# EAGLE board Board_Kelompok12 (EAGLE 7.2.0)
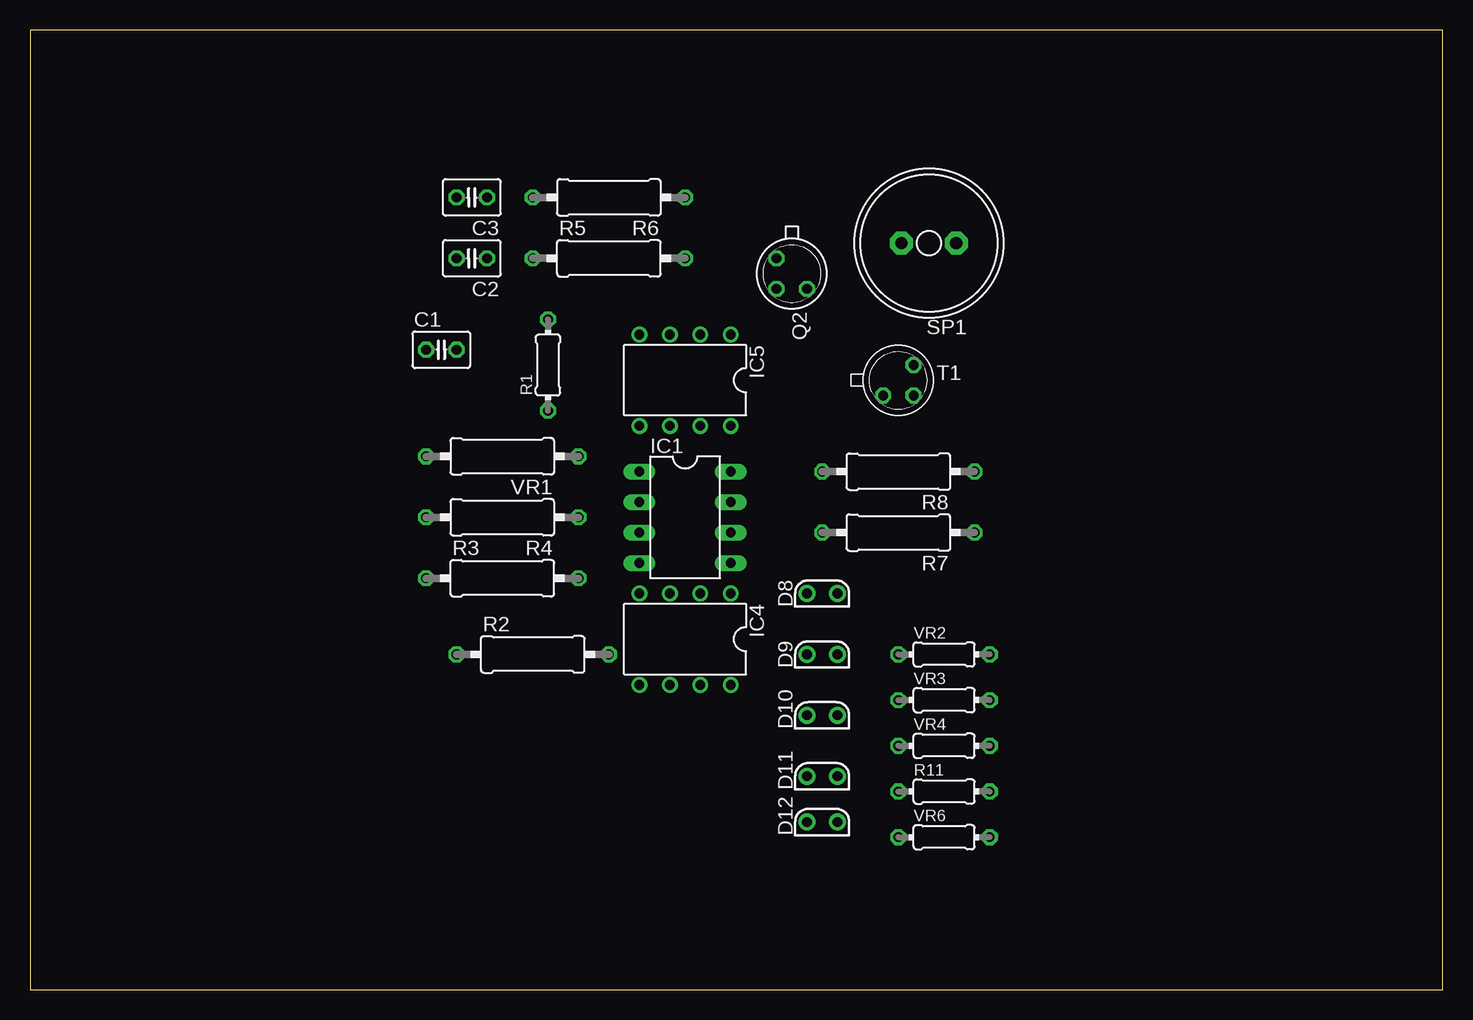
[diagram p0: board, top side]
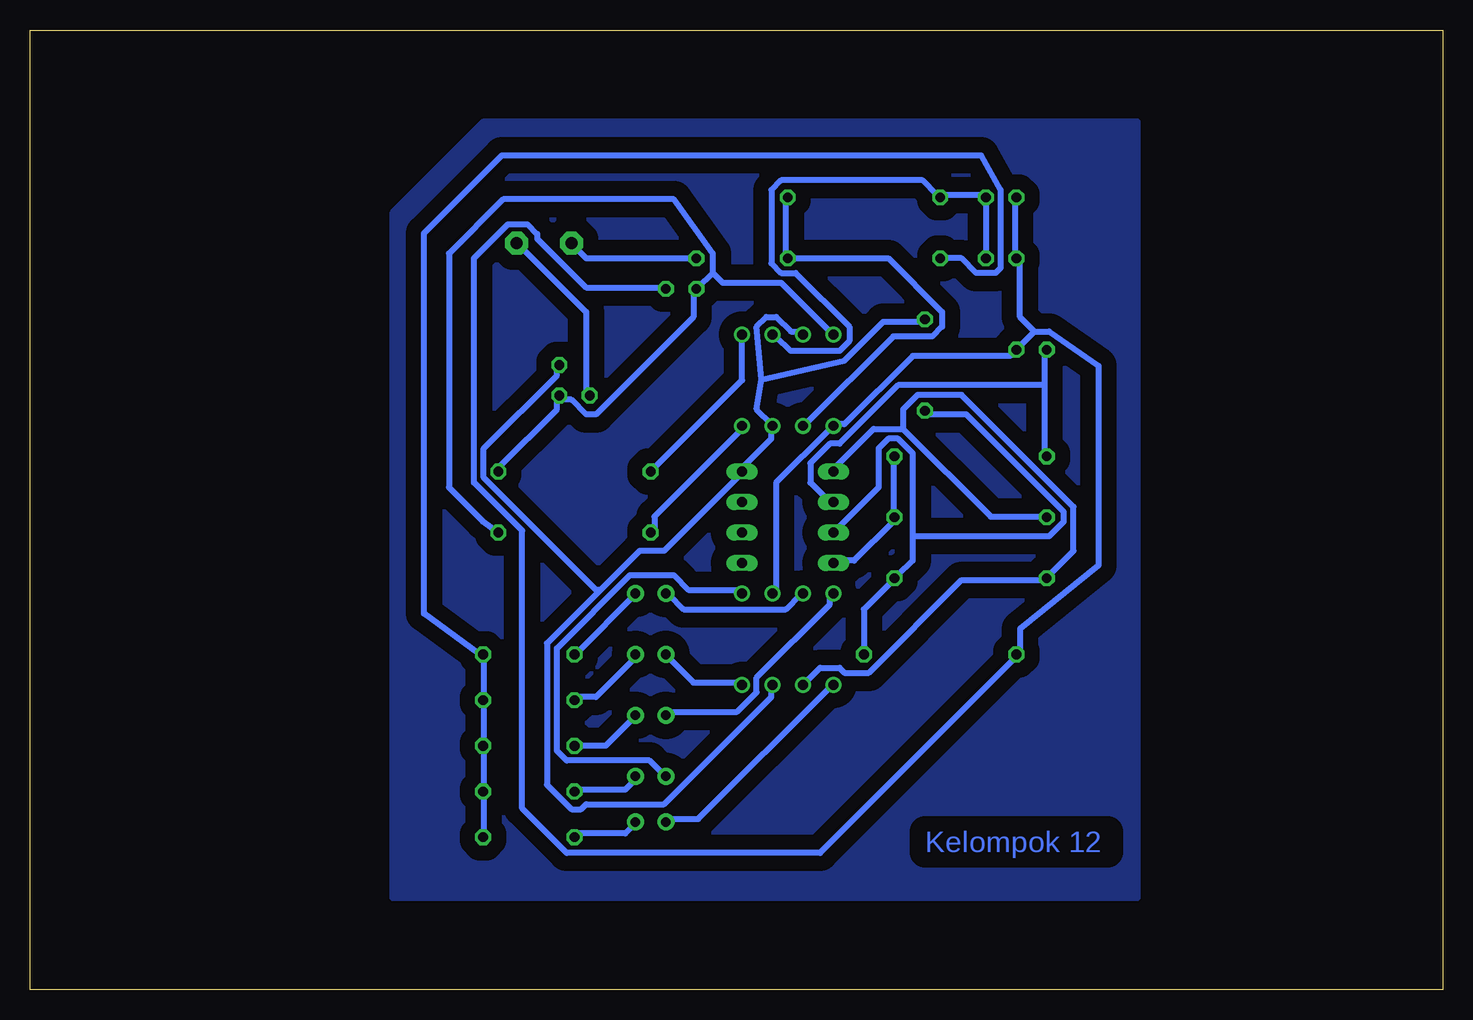
[diagram p1: board, bottom side, seen from below]

Size 117.78 x 80 mm. Coordinates in mm from the lower left corner, seen from the top.
Outline: 0,0 117.78,0 117.78,80 0,80 0,0
Copper layers (1*16): Top 0.035mm / dielectric 1.5mm / Bottom 0.035mm
Design rules "default *": minimum track width 20mil, minimum drill 24mil, track to track 12mil, track to pad 12mil, pad to pad 8mil, via to via 8mil, smd to smd 8mil, copper to edge 40mil, drill to drill 8mil, minimum pad ring 10mil, minimum via ring 8mil, stop-mask expansion 4mil, vias tented up to drill 0mil, thermal gap 10mil

## Footprints (pad centres in the part's own frame; a part is rotated, then mirrored left to right if it is on the bottom)
C025-030X050 = drill 0.813 octagon: 1 -1.27,0; 2 1.27,0
E2LINE = drill 0.8 pad 1.397: 1 0,-1.27; 2 0,1.27
DIL08 = drill 0.813 long: 1 -3.81,-3.81; 2 -1.27,-3.81; 3 1.27,-3.81; 4 3.81,-3.81; 5 3.81,3.81; 6 1.27,3.81; 7 -1.27,3.81; 8 -3.81,3.81
DIL08' = drill 0.813 pad 1.27: 1 -3.81,-3.81; 2 -1.27,-3.81; 3 1.27,-3.81; 4 3.81,-3.81; 5 3.81,3.81; 6 1.27,3.81; 7 -1.27,3.81; 8 -3.81,3.81
TO18 = drill 0.813 octagon: 1 -1.27,-1.27; 2 1.27,-1.27; 3 1.27,1.27
0204/7 = drill 0.813 octagon: 1 -3.81,0; 2 3.81,0
0309/12 = drill 0.813 octagon: 1 -6.35,0; 2 6.35,0
AL11P = drill 1.016 pad 1.905 octagon: + 2.286,0; - -2.286,0

## Placement (x,y rotation side)
C1  [C025-030X050]  34.29,53.34 0 top
C2  [C025-030X050]  36.83,60.96 180 top
C3  [C025-030X050]  36.83,66.04 180 top
D8  [E2LINE]  66.04,33.02 90 top
D9  [E2LINE]  66.04,27.94 90 top
D10  [E2LINE]  66.04,22.86 90 top
D11  [E2LINE]  66.04,17.78 90 top
D12  [E2LINE]  66.04,13.97 90 top
IC1  ICL7621PA  [DIL08]  54.61,39.37 270 top
IC4  BQ2000TPN  [DIL08']  54.61,29.21 180 top
IC5  BQ2000TPN  [DIL08']  54.61,50.8 180 top
Q2  2N2906  [TO18]  63.5,59.69 270 top
R1  [0204/7]  43.18,52.07 90 top
R2  [0309/12]  41.91,27.94 0 top
R3  [0309/12]  39.37,34.29 0 top
R4  [0309/12]  39.37,39.37 180 top
R5  [0309/12]  48.26,60.96 0 top
R6  [0309/12]  48.26,66.04 180 top
R7  [0309/12]  72.39,38.1 180 top
R8  [0309/12]  72.39,43.18 180 top
R11  [0204/7]  76.2,16.51 0 top
SP1  AL11P  [AL11P]  74.93,62.23 180 top
T1  2N2369  [TO18]  72.39,50.8 0 top
VR1  [0309/12]  39.37,44.45 180 top
VR2  [0204/7]  76.2,27.94 0 top
VR3  [0204/7]  76.2,24.13 0 top
VR4  [0204/7]  76.2,20.32 0 top
VR6  [0204/7]  76.2,12.7 0 top

## Library data of the parts
C1-C3 = resistor
D8-D12 = zetex; OC_FARNELL: unknown; OC_NEWARK: unknown
IC1 = maxim; OC_FARNELL: unknown; OC_NEWARK: unknown
IC4 IC5 = texas; MF: TEXAS INSTRUMENT CONNECTORS; MPN: BQ2000TPN-B5; OC_FARNELL: unknown; OC_NEWARK: 74C7505
Q2 = transistor-pnp
R1-R8 R11 VR1-VR4 VR6 = rcl
SP1 = buzzer; OC_FARNELL: unknown; OC_NEWARK: unknown
T1 = transistor

## Nets
N$1: IC1.8 IC4.7 IC5.3 IC5.7 R1.2 T1.3
N$2: IC1.3 R1.1 R2.2 R3.2
N$3: IC1.1 IC4.6 R3.1 R4.2
N$4: D9.1 VR3.1
N$5: C1.1 IC1.2 VR1.2
N$6: IC1.4 R4.1 VR1.1
N$7: IC5.8 R7.2
N$8: D8.2 IC4.3
N$9: D9.2 IC4.8
N$10: D10.2 IC4.4
N$11: D11.2 IC4.1
N$12: D12.2 IC4.5
N$13: D11.1 R11.1
N$14: Q2.1 SP1.+
N$15: D12.1 VR6.1
N$16: D10.1 VR4.1
N$18: R5.1 R11.2 VR2.2 VR3.2 VR4.2 VR6.2
N$19: IC5.6 R5.2 R6.1
N$20: C2.1 C3.1 IC5.2 R6.2
N$21: IC5.1 R8.2
N$22: SP1.- T1.1
N$24: IC5.4 Q2.2 R7.1 R8.1 T1.2
PE: C1.2 C2.2 C3.2 IC4.2 IC5.5 Q2.3 R2.1
VR2: D8.1 VR2.1

## Tracks (layer width: path | path; a pad name or v marks a point on that pad's centre or on a via)
N$1
  Bottom 0.508: 70.21,33.33 66.95,36.58 64.92,36.58 58.42,43.08 IC1.8 58.42,43.48 55.98,45.92 55.98,46.74 IC5.7 55.98,47.14 57.2,48.36 56.79,50.85 | 70.21,33.33 74.68,28.85 74.68,17.07 72.64,15.04 71.83,15.04 71.43,15.44 64.92,15.44 55.98,24.38 55.98,25.2 IC4.7 | 70.21,33.33 70.61,33.33 79.96,42.67 79.96,45.11 73.86,51.21 73.86,52.02 T1.3 | 56.79,50.85 57.2,55.27 56.39,56.08 55.58,56.08 54.36,54.86 53.54,54.86 IC5.3 | 56.79,50.85 49.89,52.43 46.63,55.68 43.38,55.68 R1.2
N$2
  Bottom 0.508: R2.2 48.26,31.7 45.82,34.14 R3.2 45.42,34.54 44.2,35.76 44.2,37.8 | IC1.3 47.04,41.86 47.04,45.11 46.23,45.92 45.42,45.92 44.2,44.7 44.2,37.8 | 44.2,37.8 32.82,37.8 31.6,39.01 31.6,39.83 39.73,47.95 42.98,47.95 R1.1
N$3
  Bottom 0.508: 45.01,46.74 37.69,39.42 33.22,39.42 R4.2 | 45.01,46.74 47.45,46.74 50.7,43.48 IC1.1 | IC4.6 51.92,26.82 50.29,26.82 49.89,26.42 47.85,26.42 40.13,34.14 33.22,34.14 R3.1 32.82,34.54 30.79,36.58 30.79,40.23 40.13,49.58 43.79,49.58 45.01,48.36 45.01,46.74
N$4
  Bottom 0.508: VR3.1 72.24,24.38 70.61,24.38 67.36,27.64 D9.1
N$5
  Bottom 0.508: 33.22,50.39 33.22,53.24 C1.1 | 33.22,50.39 33.22,44.7 VR1.2 | 33.22,50.39 45.42,50.39 50.29,45.52 51.11,45.52 52.73,43.89 52.73,42.27 51.11,40.64 IC1.2
N$6
  Bottom 0.508: VR1.1 45.82,44.3 45.82,39.42 R4.1 45.82,39.01 49.07,35.76 50.7,35.76 IC1.4
N$7
  Bottom 0.508: R7.2 65.73,38.2 65.73,39.42 58.42,46.74 IC5.8
N$8
  Bottom 0.508: IC4.3 53.54,32.92 54.76,31.7 63.3,31.7 64.52,32.92 D8.2
N$9
  Bottom 0.508: IC4.8 58.42,25.6 62.48,25.6 64.52,27.64 D9.2
N$10
  Bottom 0.508: IC4.4 51.11,32.92 51.11,32.11 57.2,26.01 57.2,24.79 58.83,23.16 64.52,23.16 D10.2
N$11
  Bottom 0.508: IC4.1 58.42,33.33 62.89,33.33 64.11,34.54 67.77,34.54 73.86,28.45 73.86,19.91 73.05,19.1 66.14,19.1 64.92,17.88 D11.2
N$12
  Bottom 0.508: IC4.5 51.11,25.2 62.08,14.22 64.52,14.22 D12.2
N$13
  Bottom 0.508: R11.1 72.24,16.66 68.17,16.66 67.36,17.48 D11.1
N$14
  Bottom 0.508: Q2.1 71.43,60.96 72.64,62.18 SP1.+
N$15
  Bottom 0.508: VR6.1 72.24,13.01 68.17,13.01 67.36,13.82 D12.1
N$16
  Bottom 0.508: VR4.1 69.8,20.32 67.36,22.76 D10.1
N$17
  pour Bottom (isolate 1.27): 25.4,72.39 80.01,72.39 87.63,64.77 87.63,7.62 25.4,7.62
N$18
  Bottom 0.508: VR6.2 79.96,13.01 79.96,16.26 R11.2 79.96,16.66 79.96,20.32 | 79.96,20.32 79.96,23.98 VR3.2 79.96,24.38 79.96,27.64 VR2.2 80.37,28.04 84.94,31.34 84.94,63.04 78.44,69.55 38.51,69.55 36.88,66.65 36.88,60.15 37.29,59.74 38.91,59.74 40.13,60.96 R5.1 | 79.96,20.32 VR4.2
N$19
  Bottom 0.508: IC5.6 53.14,47.14 45.82,54.46 42.57,54.46 41.76,55.27 41.76,56.49 46.23,60.96 R5.2 54.76,60.96 54.76,65.84 R6.1
N$20
  Bottom 0.508: C2.1 C3.1 38.1,66.24 41.76,66.24 R6.2 42.16,66.24 43.38,67.46 55.17,67.46 55.98,66.65 55.98,60.55 55.17,59.74 53.95,59.74 49.48,55.27 49.48,54.05 50.29,53.24 54.36,53.24 55.58,54.46 IC5.2
N$21
  Bottom 0.508: IC5.1 58.42,50.8 R8.2
N$22
  Bottom 0.508: T1.1 71.43,49.58 71.43,56.49 77.11,62.18 SP1.-
N$24
  Bottom 0.508: R8.1 78.74,43.48 73.86,48.36 73.86,49.17 T1.2 73.46,49.17 72.64,49.17 71.43,47.95 70.61,47.95 62.48,56.08 62.48,58.12 Q2.2 62.08,58.52 60.86,59.74 | R7.1 80.01,39.01 82.86,41.86 82.86,61.37 78.33,65.89 64.11,65.89 60.86,61.37 60.86,59.74 | 60.86,59.74 60.05,58.93 55.17,58.93 51.11,54.86 IC5.4
PE
  Bottom 0.508: IC4.2 55.58,33.33 55.58,42.27 51.11,46.74 IC5.5 50.7,47.14 49.89,47.14 44.2,52.83 36.07,52.83 C1.2 34.04,54.86 | C3.2 35.66,65.84 35.66,60.96 C2.2 35.26,60.96 35.26,56.08 34.04,54.86 | 34.04,54.86 32.82,54.86 28.7,52.02 28.7,35.36 35.26,30.07 35.26,28.04 R2.1 35.66,27.64 51.92,11.38 73.05,11.38 76.76,15.09 76.76,38.25 80.77,42.27 80.77,60.96 77.93,63.8 76.3,63.8 75.49,62.99 75.49,62.59 71.43,58.52 64.92,58.52 Q2.3
VR2
  Bottom 0.508: VR2.1 72.24,28.04 67.36,32.92 D8.1

## Text on the board
Bottom: Kelompok 12